# EAGLE board Esquema final v1 (EAGLE 9.7.0)

Size 111.74 x 105.08 mm. Coordinates in mm from the lower left corner, seen from the top.
Outline: 0,0 111.74,0 111.74,105.08 0,105.08 0,0
Copper layers (1*16): Top 0.035mm / dielectric 1.5mm / Bottom 0.035mm
Design rules "default": minimum track width 6mil, minimum drill 0.35mm, track to track 6mil, track to pad 6mil, pad to pad 6mil, via to via 6mil, smd to smd 6mil, copper to edge 40mil, drill to drill 6mil, minimum pad ring 10mil, minimum via ring 8mil, stop-mask expansion 4mil, vias tented up to drill 0mil, thermal gap 10mil

## Footprints (pad centres in the part's own frame; a part is rotated, then mirrored left to right if it is on the bottom)
DCJACK_2MM_PTH = drill 2.8: GND 0,7.35; GNDBREAK 4.8,10.75 | drill 3.2: PWR 0,13.6
MA05-2 = drill 1.016 octagon: 1 -5.08,-1.27; 2 -5.08,1.27; 3 -2.54,-1.27; 4 -2.54,1.27; 5 0,-1.27; 6 0,1.27; 7 2.54,-1.27; 8 2.54,1.27; 9 5.08,-1.27; 10 5.08,1.27
7SEG-13 = drill 0.813 long: 1 -5.08,-7.62; 2 -2.54,-7.62; 3 0,-7.62; 4 2.54,-7.62; 5 5.08,-7.62; 6 5.08,7.62; 7 2.54,7.62; 8 0,7.62; 9 -2.54,7.62; 10 -5.08,7.62
SOT563 = smd 0.4 x 0.6: 1 -0.5,-0.7; 2 0,-0.7; 3 0.5,-0.7; 4 0.5,0.7; 5 0,0.7; 6 -0.5,0.7
LED5MM = drill 0.813 pad 1.676 octagon: A -1.27,0; K 1.27,0
0204V = drill 0.813 octagon: 1 -1.27,0; 2 1.27,0
EDG-07 = drill 0.813 long: 1 -7.62,-3.81; 2 -5.08,-3.81; 3 -2.54,-3.81; 4 0,-3.81; 5 2.54,-3.81; 6 5.08,-3.81; 7 7.62,-3.81; 8 7.62,3.81; 9 5.08,3.81; 10 2.54,3.81; 11 0,3.81; 12 -2.54,3.81; 13 -5.08,3.81; 14 -7.62,3.81
EDG-08 = drill 0.813 long: 1 -8.89,-3.81; 2 -6.35,-3.81; 3 -3.81,-3.81; 4 -1.27,-3.81; 5 1.27,-3.81; 6 3.81,-3.81; 7 6.35,-3.81; 8 8.89,-3.81; 9 8.89,3.81; 10 6.35,3.81; 11 3.81,3.81; 12 1.27,3.81; 13 -1.27,3.81; 14 -3.81,3.81; 15 -6.35,3.81; 16 -8.89,3.81
DIP-28 = drill 0.79 pad 1.19 square: 1 -3.95,16.51 | drill 0.79 pad 1.19: 2 -3.95,13.97; 3 -3.95,11.43; 4 -3.95,8.89; 5 -3.95,6.35; 6 -3.95,3.81; 7 -3.95,1.27; 8 -3.95,-1.27; 9 -3.95,-3.81; 10 -3.95,-6.35; 11 -3.95,-8.89; 12 -3.95,-11.43; 13 -3.95,-13.97; 14 -3.95,-16.51; 15 3.95,-16.51; 16 3.95,-13.97; 17 3.95,-11.43; 18 3.95,-8.89; 19 3.95,-6.35; 20 3.95,-3.81; 21 3.95,-1.27; 22 3.95,1.27; 23 3.95,3.81; 24 3.95,6.35; 25 3.95,8.89; 26 3.95,11.43; 27 3.95,13.97; 28 3.95,16.51

## Placement (x,y rotation side)
CN1  [DCJACK_2MM_PTH]  25.4,44.45 0 top
CONECTOR  [MA05-2]  6.86,25.4 0 top
DS2  7SEG-CK  [7SEG-13]  46.99,93.98 0 top
IC1  TMP102AIDRLR  [SOT563]  10.16,82.55 0 top
LED1  [LED5MM]  6.35,6.35 0 top
R1  470  [0204V]  20.32,6.35 0 top
R16  470  [0204V]  107.95,52.07 0 top
R17  470  [0204V]  86.36,39.37 0 top
R18  470  [0204V]  91.44,39.37 0 top
R19  470  [0204V]  96.52,39.37 0 top
R20  470  [0204V]  101.6,39.37 0 top
R21  470  [0204V]  106.68,39.37 0 top
R22  470  [0204V]  86.36,33.02 0 top
SW1  [EDG-07]  62.23,31.75 0 top
SW4  [EDG-08]  35.56,31.75 0 top
U1  ATMEGA328P-PU  [DIP-28]  6.35,54.61 0 top

## Library data of the parts
CN1 LED1 = adafruit
CONECTOR = con-lstb; OC_FARNELL: unknown; OC_NEWARK: unknown
DS2 = Opto-Electronic; CATEGORY: Opto-Electronic; SUB-CATEGORY: Display; TYPE: 7-Segment
IC1 = Sensor; CATEGORY: Sensor; MANUFACTURER: TI; MPN: TMP102AIDRLR; OPERATING_TEMP: -55 to 150 °C; PART_STATUS: Active; ROHS_COMPLIANT: RoHS3 Compliant; SUB-CATEGORY: Temperature
R1 R16-R22 = rcl; SPICEPREFIX: R
SW1 SW4 = special
U1 = Microcontroller; CREATED_BY: PCBLayout.com; DIGIKEY_PART_NUMBER: ATMEGA328P-PU-ND; MANUFACTURER: Microchip Technology; MPN: ATMEGA328P-PU; PACKAGE: DIP-28

## Nets
+5V: CN1.PWR CONECTOR.10
AVCC: U1.20
GND: CN1.GND CN1.GNDBREAK CONECTOR.2 DS2.3 DS2.8 LED1.K
GND1: U1.22
GPIO1: CONECTOR.9 SW4.1
GPIO2: CONECTOR.7 SW4.2
GPIO3: CONECTOR.5 SW4.3
GPIO4: CONECTOR.3 SW4.4
GPIO5: CONECTOR.1 SW4.5
GPIO34: SW1.7
GPIO35: SW1.6
GPIO36: SW1.5
GPIO37: SW1.4
GPIO38: SW1.3
GPIO39: SW1.2
GPIO40: CONECTOR.8 SW1.1 SW4.8
GPIO41: CONECTOR.4 SW4.7
GPIO42: CONECTOR.6 SW4.6
N$1: IC1.2 U1.8
N$2: LED1.A R1.2
N$3: IC1.5 U1.7
N$15: DS2.10 R22.1
N$16: DS2.9 R21.1
N$17: DS2.4 R18.2
N$18: DS2.2 R19.2
N$36: R1.1 SW4.16
N$46: DS2.1 R20.2
N$47: DS2.6 R17.2
N$48: DS2.7 R16.2
N$50: R19.1 SW1.9
N$51: R18.1 SW1.10
N$52: R17.1 SW1.14
N$53: R16.1 SW1.13
N$54: R21.2 SW1.12
N$55: R22.2 SW1.11
N$63: R20.1 SW1.8

## Tracks (layer width: path | path; a pad name or v marks a point on that pad's centre or on a via)
+5V  (1 unrouted)
GND  (5 unrouted)
GPIO1  (1 unrouted)
GPIO2  (1 unrouted)
GPIO3  (1 unrouted)
GPIO4  (1 unrouted)
GPIO5  (1 unrouted)
GPIO40  (2 unrouted)
GPIO41  (1 unrouted)
GPIO42  (1 unrouted)
N$1  (1 unrouted)
N$2  (1 unrouted)
N$3  (1 unrouted)
N$15  (1 unrouted)
N$16  (1 unrouted)
N$17  (1 unrouted)
N$18  (1 unrouted)
N$36  (1 unrouted)
N$46  (1 unrouted)
N$47  (1 unrouted)
N$48  (1 unrouted)
N$50  (1 unrouted)
N$51  (1 unrouted)
N$52  (1 unrouted)
N$53  (1 unrouted)
N$54  (1 unrouted)
N$55  (1 unrouted)
N$63  (1 unrouted)